# Altium PCB nexusqfp.PcbDoc (part 2 of 2)
Units mm, origin at the board's own origin, x right, y up, seen from the top; angles counter-clockwise.
Board outline 100 x 100 mm, 2 copper layers (Top Layer, Bottom Layer); 128 components, 155 nets, 699 pads, 158 vias.
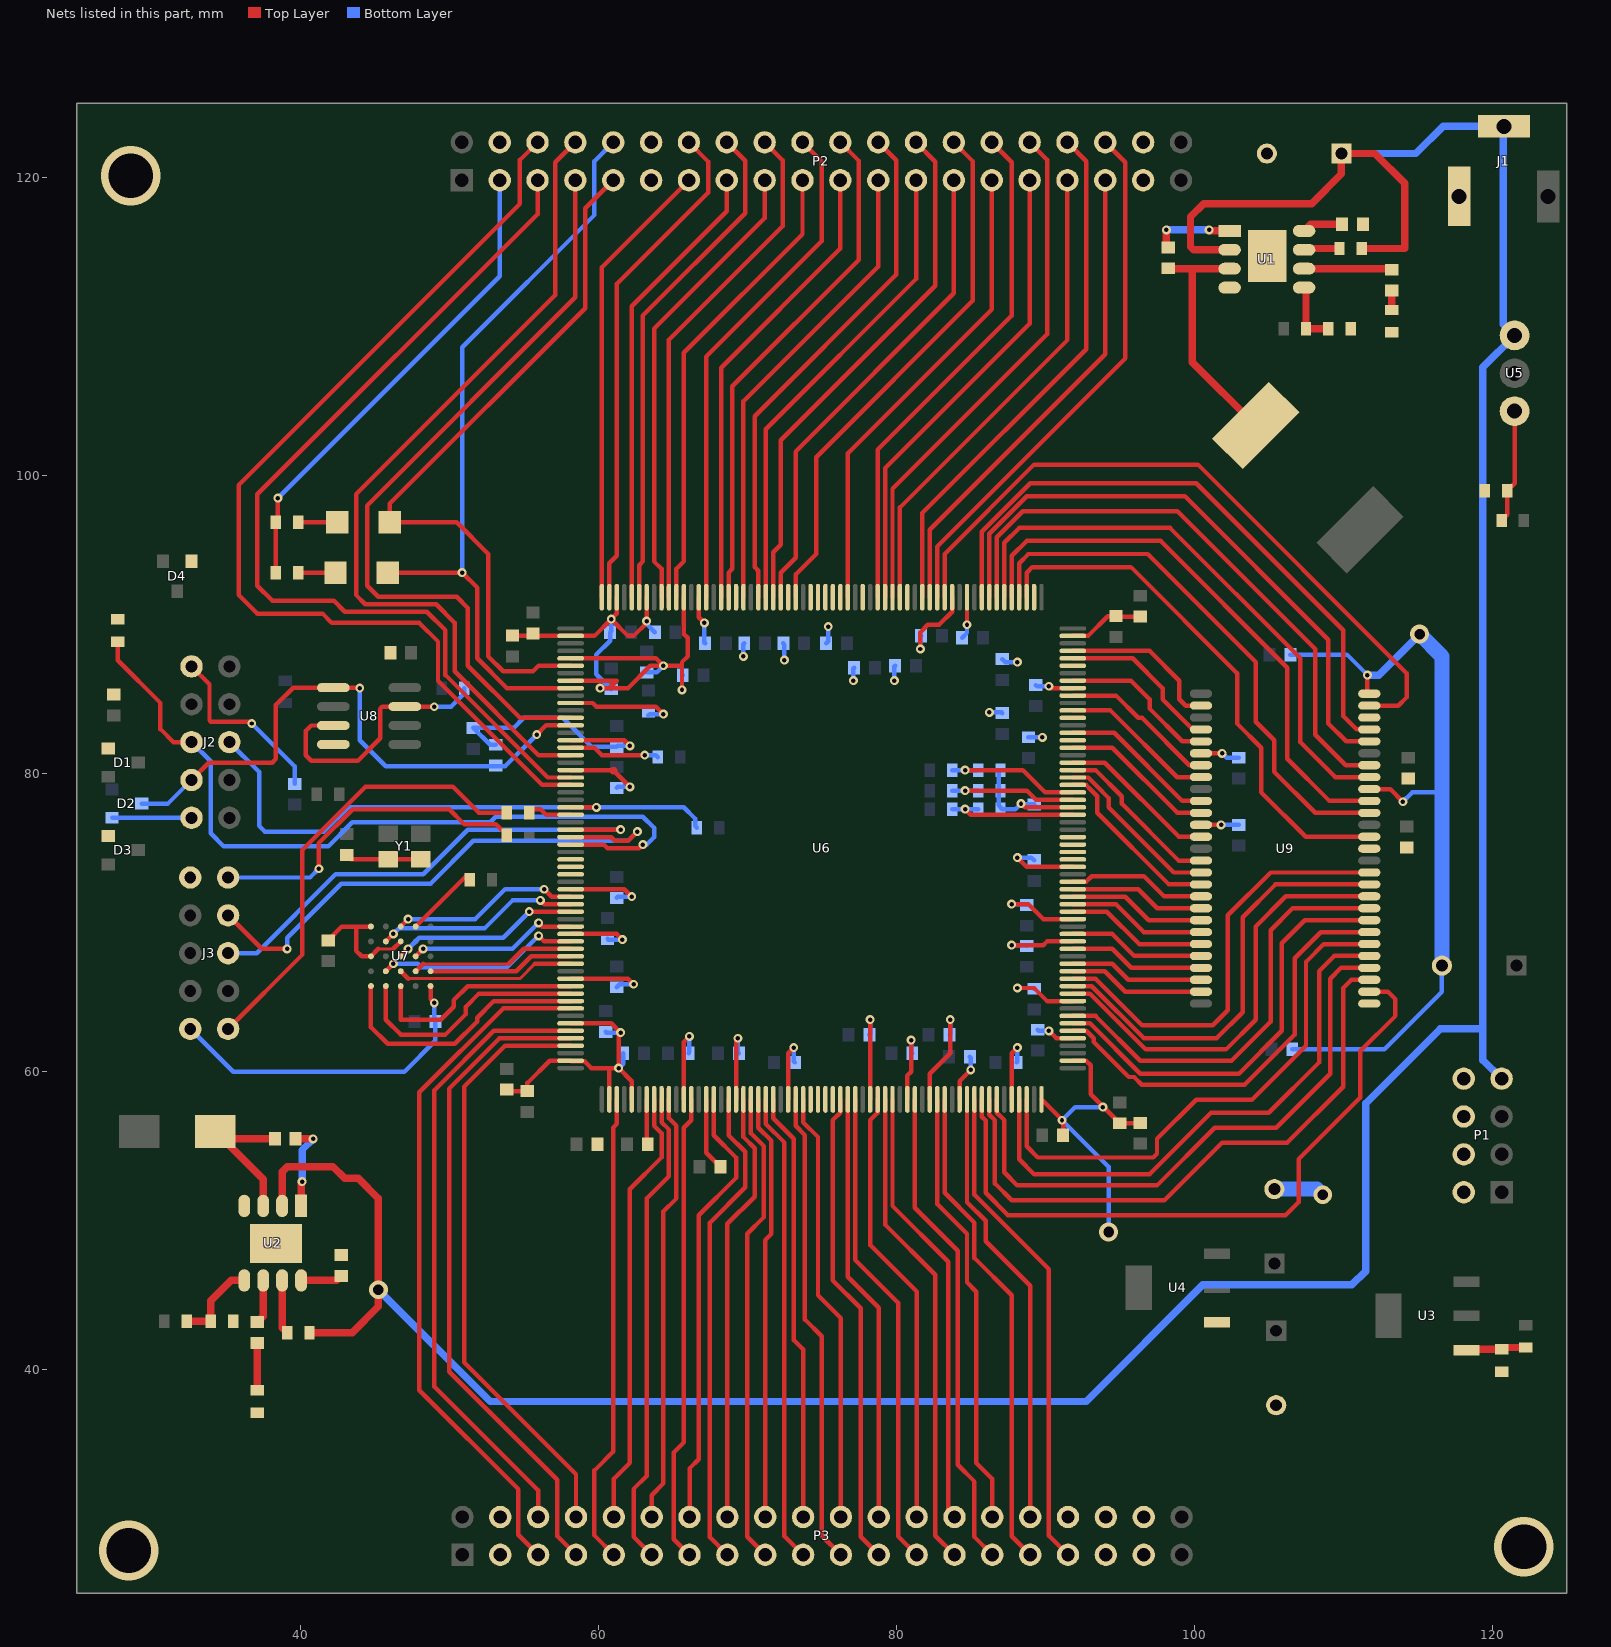
[diagram p2: the nets of this part, all layers, seen from the top]

## Via types
v1: diameter 0.6, hole 0.3, Top Layer to Bottom Layer, tented both sides, 141 vias
v2: diameter 1.27, hole 0.711, Top Layer to Bottom Layer, 14 vias
v3: diameter 4, hole 3, Top Layer to Bottom Layer, 3 vias

## Nets (pads, with @x,y where several pads share a name; then routed paths per layer and width w, separated by ;. In a path a pad name is that pad's centre, name@x,y a point inside that pad or via, vN(x,y) a via of type N, cw(c..) or ccw(c..) an arc to the next point about the centre after c; other vN are vias at no path point) (continued)
FPGA_TDI: R16.2 U6.26 | length 2.9
  Top Layer w0.3: R16.2@55.375,77.625 56.125,77.625 56.5,77.25 U6.26@58.15,77.25
GND: C3.1 C5.1 C7.2 C8.2 C9.2 C10.2 C11.1 C12.1 C13.1 C14.1 C15.2 C16.2 C17.2 C18.2 C19.1 C20.1 C21.1 C22.1 C23.1 C24.1 C25.1 C26.1 C27.1 C28.1 C29.1 C30.1 C31.1 C32.1 C33.1 C34.1 C35.1 C36.1 C37.1 C38.1 C39.1 C40.1 C41.1 C42.1 C43.1 C44.1 C45.1 C46.1 C47.1 C48.1 C49.1 C50.1 C51.1 C52.1 C53.1 C54.1 C55.1 C56.1 C57.1 C58.1 C59.1 C60.1 C61.1 C62.1 C63.1 C64.1 C65.1 C66.1 C67.1 C68.1 C69.1 C70.1 C71.1 C72.1 C73.1 C74.1 C75.1 D1.1 D2.1 D3.1 D4.1 J1.1 J2.2 J2.10 J3.2 J3.10 P1.2 P1.4 P1.6 P1.8 P2.3 P2.4 P2.37 P2.38 P3.3 P3.4 P3.34 P3.35 P3.36 P3.37 P3.38 R6.1 R7.1 R8.1 R9.1 R10.1 R12.1 R21.1 R22.1 R23.1 R24.2 R30.1 R31.1 U1.4 U1.EP U2.4 U2.EP U4.1 U6.2 U6.5 U6.8 U6.11 U6.16 U6.20 U6.32 U6.33 U6.34 U6.36 U6.42 U6.48 U6.54 U6.59 U6.62 U6.65 U6.67 U6.72 U6.75 U6.79 U6.86 U6.89 U6.90 U6.91 U6.92 U6.97 U6.102 U6.105 U6.109 U6.116 U6.120 U6.122 U6.125 U6.130 U6.138 U6.141 U6.148 U6.149 U6.150 U6.151 U6.152 U6.156 U6.165 U6.168 U6.172 U6.175 U6.179 U6.182 U6.191 U6.193 U6.199 U6.205 U6.208 U6.209 U6.210 U6.211 U6.212 U6.215 U6.222 U6.227 U6.229 U6.234 U6.238 U7.A1 U7.B3 U7.C1 U7.E5 U8.4 U9.6 U9.12 U9.28 U9.41 U9.46 U9.52 U9.54 Y1.1 Y1.2 | length 393.9
  Top Layer w0.2: 45.25,68.25 46.25,68.25
  Top Layer w0.3: J2.2@32.71,87.205 33.915,86 33.915,83.585 34,83.5 36.625,83.5 v1(36.75,83.375) ; R31.1@38.375,93.5 R30.1@38.375,96.875 38.5,97 v1(38.5,98.5) ; C12.1@41.875,68.825 42.8,69.75 43.75,69.75 ; C13.1@43.125,74.55 43.4,74.275 Y1.1@45.9,74.275 Y1.2@48.1,74.275 ; U7.A1@44.75,69.75 43.75,69.75 ; 45.25,68.25 U7.C1@44.75,67.75 44.125,67.75 43.75,68.125 43.75,69.75 ; C14.1@46.05,88.05 C14.1@46.05,88.125 ; 46.25,68.25 U7.B3@46.75,68.75 ; U7.E5@48.75,65.75 48.75,64.875 v1(49,64.625) ; C69.1@53.975,58.7 C73.1@55.25,58.7 55.25,59.25 56.75,60.75 U6.59@58.15,60.75 58.198,60.702 59.087,60.702 59.539,60.25 60.625,60.25 ; C68.1@54.25,89.275 55.475,89.275 C72.1@55.625,89.425 55.8,89.25 U6.2@58.15,89.25 59.75,89.25 v1(60.875,90.375) ; U6.54@58.15,63.25 60.875,63.25 v1(61.5,62.625) 61.375,62.5 v1(61.375,60.25) ; U6.48@58.15,66.25 62,66.25 v1(62.375,65.875) ; U6.42@58.15,69.25 61.25,69.25 v1(61.625,68.875) ; U6.36@58.15,72.25 61.75,72.25 v1(62.25,71.75) ; U6.20@58.15,80.25 61,80.25 61.052,80.198 v1(62.125,79.125) ; U6.16@58.15,82.25 61.75,82.25 v1(62.125,81.875) ; U6.11@58.15,84.75 59.634,84.75 59.884,84.5 63.875,84.5 v1(64.375,84) ; U6.8@58.15,86.25 61.25,86.25 60.75,85.75 ; U6.5@58.15,87.75 63.875,87.75 v1(64.375,87.25) ; v1(60.125,85.75) 60.75,85.75 ; U6.62@60.75,58.15 60.75,60.125 60.625,60.25 ; U6.238@61.25,91.85 61.25,90.75 v1(60.875,90.375) ; U6.65@62.25,58.15 62.25,59.375 v1(61.375,60.25) ; U6.67@63.25,58.15 63.25,55.2 C46.1@63.325,55.125 ; U6.234@63.25,91.85 v1(63.25,90.25) 63.25,90.125 62.375,89.25 62,89.25 v1(60.875,90.375) ; v1(65.625,85.625) 65.625,87.125 ; U6.72@65.75,58.15 65.75,62 v1(66.125,62.375) ; U6.229@65.75,91.85 65.75,89.375 66,89.125 66,87.875 65.625,87.5 65.625,87.125 ; U6.227@66.75,91.85 66.75,90.5 v1(67.125,90.125) ; U6.75@67.25,58.15 67.25,54.575 C48.1@68.2,53.625 ; U6.79@69.25,58.15 69.25,62.125 v1(69.375,62.25) ; U6.86@72.75,58.15 72.75,61.25 v1(73.125,61.625) ; U6.97@78.25,58.15 v1(78.25,63.5) ; U6.102@80.75,58.15 80.75,59.75 81,60 v1(81,62.125) ; v1(81.625,88.375) 81.625,89.5 82.125,90 82.875,90 83.75,90.875 U6.193@83.75,91.85 ; U6.105@82.25,58.15 82.25,59.875 83.625,61.25 v1(83.625,63.5) ; U6.109@84.25,58.15 84.25,59.375 v1(85,60.125) ; v1(84.75,90) U6.191@84.75,91.85 ; U6.116@87.75,58.15 87.75,61.25 v1(88.125,61.625) ; v1(87.75,68.5) 89.875,68.5 90.125,68.75 U6.138@91.85,68.75 ; v1(87.75,71.25) 88.875,71.25 89.875,70.25 U6.141@91.85,70.25 ; v1(88.125,65.625) 89.25,65.625 90.125,64.75 U6.130@91.85,64.75 ; v1(88.125,74.375) 88.75,73.75 U6.148@91.85,73.75 ; v1(88.375,78) 88.625,77.75 U6.156@91.85,77.75 ; U6.120@89.75,58.15 91.2,56.7 C52.1@91.2,55.75 ; v1(90.25,62.75) 90.75,62.25 U6.125@91.85,62.25 ; v1(90.25,85.875) 90.375,85.75 U6.172@91.85,85.75 ; U6.122@91.85,60.75 92.739,60.75 93.052,60.437 93.052,58.498 C70.1@95,56.55 96.35,56.55 C74.1@96.375,56.575 ; U6.179@91.85,89.25 92.875,89.25 94.2,90.575 C71.1@94.75,90.575 94.775,90.55 C75.1@96.375,90.55 ; U9.12@100.45,76.575 v1(101.8,76.575) ; U9.6@100.45,81.375 v1(101.875,81.375) ; v1(111.625,86.625) 111.625,85.5 U9.54@111.75,85.375 ; U9.46@111.75,78.975 113.15,78.975 v1(114,78.125) ; 60.625,60.25 v1(61.375,60.25) ; 60.75,85.75 62,85.75 63.5,87.25 v1(64.375,87.25) ; v1(64.375,87.25) 65.5,87.25 65.625,87.125
  Top Layer w0.5: 61,80.198 61.052,80.198
  Bottom Layer w0.3: D2.1@27.375,77.05 32.705,77.05 J2.10@32.71,77.045 ; J3.10@32.625,62.88 35.505,60 47,60 49.075,62.075 C11.1@49.075,63.375 49,63.45 v1(49,64.625) ; v1(36.75,83.375) 39.625,80.5 C17.2@39.625,79.325 ; v1(38.5,98.5) 53.39,113.39 P2.3@53.39,119.835 ; C16.2@53.125,81.95 52.75,81.95 C18.2@51.625,83.075 54.325,83.075 55,83.75 57.625,83.75 59.575,81.8 C26.1@61.25,81.8 61.325,81.875 v1(62.125,81.875) ; v1(60.125,85.75) C25.1@60.8,85.75 ; C44.1@60.5,62.675 60.55,62.625 v1(61.5,62.625) ; C43.1@60.625,68.925 60.675,68.875 v1(61.625,68.875) ; C25.1@60.875,85.675 C25.1@60.8,85.75 ; v1(60.875,90.375) 60.875,89.575 C65.1@60.8,89.5 60.8,88.925 59.875,88 59.875,86.675 C25.1@60.8,85.75 ; C28.1@61.25,65.675 61.45,65.875 v1(62.375,65.875) ; C27.1@61.25,71.675 61.325,71.75 v1(62.25,71.75) ; C42.1@61.25,79.05 61.325,79.125 v1(62.125,79.125) ; v1(61.375,60.25) 61.675,60.55 C29.1@61.675,61.25 ; C41.1@63.25,86.8 63.925,86.8 v1(64.375,87.25) ; v1(63.25,90.25) 63.25,90.05 C66.1@63.8,89.5 ; C67.1@63.375,83.925 63.45,84 v1(64.375,84) ; v1(65.625,85.625) 65.625,86.575 C60.1@65.675,86.625 ; C47.1@66.075,61.25 66.125,61.3 v1(66.125,62.375) ; v1(67.125,90.125) 67.125,88.8 C40.1@67.175,88.75 ; v1(69.375,62.25) 69.375,61.325 C30.1@69.45,61.25 ; v1(69.75,87.875) 69.75,88.7 C64.1@69.8,88.75 ; C39.1@72.425,88.75 72.5,88.675 v1(72.5,87.625) ; v1(73.125,61.625) 73.125,60.7 C49.1@73.2,60.625 ; C38.1@75.3,88.75 75.437,88.887 v1(75.437,89.875) ; v1(77.125,86.25) 77.125,87.075 C63.1@77.175,87.125 ; C31.1@78.2,62.5 78.25,62.55 v1(78.25,63.5) ; v1(79.875,86.25) 79.875,87.2 C62.1@79.925,87.25 ; v1(81,62.125) 81,61.325 C50.1@81.075,61.25 ; v1(81.625,88.375) 81.625,89.2 C37.1@81.675,89.25 ; C32.1@83.575,62.5 83.625,62.55 v1(83.625,63.5) ; C61.1@84.425,89.125 84.75,89.45 v1(84.75,90) ; C51.1@84.95,61 85,60.95 v1(85,60.125) ; v1(86.25,84.125) 87.075,84.125 C58.1@87.125,84.075 ; R23.1@86.875,80.25 86.875,77.875 87.125,77.625 88,77.625 v1(88.375,78) 88.425,77.95 C35.1@89.25,77.95 ; C59.1@87.125,87.7 87.325,87.5 v1(88.125,87.5) ; v1(87.75,68.5) 88.7,68.5 C34.1@88.75,68.45 ; v1(87.75,71.25) 88.7,71.25 C55.1@88.75,71.2 ; C53.1@88.075,60.625 88.125,60.675 v1(88.125,61.625) ; v1(88.125,65.625) 89.2,65.625 C54.1@89.25,65.575 ; v1(88.125,74.375) 89.075,74.375 C56.1@89.25,74.2 ; C57.1@88.875,82.45 88.887,82.438 v1(89.813,82.438) ; C36.1@89.375,85.95 89.45,85.875 v1(90.25,85.875) ; C33.1@89.5,62.825 89.575,62.75 v1(90.25,62.75) ; v1(93.875,57.625) 92,57.625 v1(91.125,56.75) 94.25,53.625 v2(94.25,49.25) ; v1(101.8,76.575) C23.1@103,76.575 ; v1(101.875,81.375) 102.175,81.075 C24.1@103,81.075 ; C22.1@106.45,88 110.25,88 v1(111.625,86.625) ; C21.1@106.575,61.5 112.75,61.5 116.625,65.375 C8.2@116.625,67.125 ; v2@108.25,52.125 v2(108.625,51.75) ; v1(114,78.125) 114.625,78.75 116.625,78.75
  Bottom Layer w0.5: v1(111.625,86.625) 112.375,86.625 v2(115.125,89.375)
  Bottom Layer w1: C9.2@105.375,52.125 v2@108.25,52.125 ; v2(115.125,89.375) 116.625,87.875 116.625,78.75 C8.2@116.625,67.125
  other v3: 28.5,27.875 122.125,28.125 28.625,120.125
GPIO0_0: P2.5 U6.21 | length 63.1
  Top Layer w0.3: P2.5@55.93,119.835 55.93,117.555 37.125,98.75 37.125,92.625 38.125,91.625 42.25,91.625 43,90.875 48.5,90.875 49.75,89.625 49.75,86.625 56.625,79.75 U6.21@58.15,79.75
GPIO0_1: P2.6 U6.22 | length 67.8
  Top Layer w0.3: P2.6@55.93,122.375 54.75,121.195 54.75,118.25 35.875,99.375 35.875,92 37.125,90.75 41.5,90.75 42.125,90.125 48,90.125 49.25,88.875 49.25,86.25 56.25,79.25 U6.22@58.15,79.25
GPIO0_2: P2.7 U6.13 | length 52.6
  Top Layer w0.3: U6.13@58.15,83.75 54.75,83.75 51.25,87.25 51.25,91.125 50.5,91.875 45.25,91.875 44.5,92.625 44.5,98 58.47,111.97 P2.7@58.47,119.835
GPIO0_3: P2.8 U6.18 | length 57.2
  Top Layer w0.3: U6.18@58.15,81.25 56,81.25 50.375,86.875 50.375,90.125 49.125,91.375 44.375,91.375 43.75,92 43.75,98.75 57.125,112.125 57.125,121.03 P2.8@58.47,122.375
GPIO0_4: D5.1 P2.9 U6.6 | length 49.7
  Top Layer w0.3: U6.6@58.15,87.25 56,87.25 55.625,86.875 53.625,86.875 52.625,87.875 52.625,94.75 50.5,96.875 D5.1@46,96.875 46,98.125 59.125,111.25 59.125,117.95 P2.9@61.01,119.835
GPIO0_5: D6.1 P2.10 U6.9 | length 51.3
  Top Layer w0.3: D6.1@45.875,93.501 v1(50.874,93.501) 51.875,92.5 51.875,87.75 53.875,85.75 U6.9@58.15,85.75
  Bottom Layer w0.3: v1(50.874,93.501) 50.874,108.624 59.75,117.5 59.75,121.115 P2.10@61.01,122.375
GPIO0_6: P2.11
GPIO0_7: P2.12
GPIO0_8: P2.13 U6.240 | length 30.4
  Top Layer w0.3: U6.240@60.25,91.85 60.25,113.995 P2.13@66.09,119.835
GPIO0_9: P2.14 U6.239 | length 33.8
  Top Layer w0.3: U6.239@60.75,91.85 60.75,94.125 61.25,94.625 61.25,112.875 67.375,119 67.375,121.09 P2.14@66.09,122.375
GPIO0_10: P2.15 U6.236 | length 30.6
  Top Layer w0.3: U6.236@62.25,91.85 62.25,111.375 68.63,117.755 P2.15@68.63,119.835
GPIO0_11: P2.16 U6.235 | length 34
  Top Layer w0.3: U6.235@62.75,91.85 62.75,94 63,94.25 63,110.75 69.875,117.625 69.875,121.13 P2.16@68.63,122.375
GPIO0_12: P2.17 U6.232 | length 31.3
  Top Layer w0.3: U6.232@64.25,91.85 64.25,93.75 63.75,94.25 63.75,109.875 71.17,117.295 P2.17@71.17,119.835
GPIO0_13: P2.18 U6.231 | length 34.2
  Top Layer w0.3: U6.231@64.75,91.85 64.75,109.125 72.375,116.75 72.375,121.17 P2.18@71.17,122.375
GPIO0_14: P2.19 U6.230 | length 31.5
  Top Layer w0.3: U6.230@65.25,91.85 65.25,93.75 65.75,94.25 65.75,108.25 73.71,116.21 P2.19@73.71,119.835
GPIO0_15: P2.20 U6.226 | length 34.3
  Top Layer w0.3: U6.226@67.25,91.85 67.25,108 75,115.75 75,121.085 P2.20@73.71,122.375
GPIO0_16: P2.21 U6.224 | length 31.3
  Top Layer w0.3: U6.224@68.25,91.85 68.25,107.25 76.25,115.25 P2.21@76.25,119.835
GPIO0_17: P2.22 U6.223 | length 34.7
  Top Layer w0.3: U6.223@68.75,91.85 68.75,93.5 69,93.75 69,106 77.5,114.5 77.5,121.125 P2.22@76.25,122.375
GPIO0_18: P2.23 U6.221 | length 31.7
  Top Layer w0.3: U6.221@69.75,91.85 69.75,105 78.79,114.04 P2.23@78.79,119.835
GPIO0_19: P2.24 U6.219 | length 35.1
  Top Layer w0.3: U6.219@70.75,91.85 70.75,93.625 70.5,93.875 70.5,104 80,113.5 80,121.165 P2.24@78.79,122.375
GPIO0_20: P2.25 U6.218 | length 32.2
  Top Layer w0.3: U6.218@71.25,91.85 71.25,103.125 81.33,113.205 P2.25@81.33,119.835
GPIO0_21: P2.26 U6.217 | length 35.6
  Top Layer w0.3: U6.217@71.75,91.85 71.75,94.875 72.25,95.375 72.25,102.375 82.625,112.75 82.625,121.08 P2.26@81.33,122.375
GPIO0_22: P2.27 U6.216 | length 32.8
  Top Layer w0.3: U6.216@72.25,91.85 72.25,93.5 73.25,94.5 73.25,101.625 83.87,112.245 P2.27@83.87,119.835
GPIO0_23: P2.28 U6.214 | length 36
  Top Layer w0.3: U6.214@73.25,91.85 73.25,93.375 74.625,94.75 74.625,101.25 85.125,111.75 85.125,121.12 P2.28@83.87,122.375
GPIO0_24: P2.29 U6.207 | length 32
  Top Layer w0.3: U6.207@76.75,91.85 76.75,101.5 86.41,111.16 P2.29@86.41,119.835
GPIO0_25: P2.30 U6.203 | length 34.8
  Top Layer w0.3: U6.203@78.75,91.85 78.75,101.75 87.75,110.75 87.75,121.035 P2.30@86.41,122.375
GPIO0_26: P2.31 U6.202 | length 32
  Top Layer w0.3: U6.202@79.25,91.85 79.25,100.5 88.95,110.2 P2.31@88.95,119.835
GPIO0_27: P2.32 U6.201 | length 35.3
  Top Layer w0.3: U6.201@79.75,91.85 79.75,99.125 90.125,109.5 90.125,121.2 P2.32@88.95,122.375
GPIO0_28: P2.33 U6.200 | length 32.6
  Top Layer w0.3: U6.200@80.25,91.85 80.25,97.875 91.49,109.115 P2.33@91.49,119.835
GPIO0_29: P2.34 U6.197 | length 35.6
  Top Layer w0.3: U6.197@81.75,91.85 81.75,97.5 92.75,108.5 92.75,121.115 P2.34@91.49,122.375
GPIO0_30: P2.35 U6.196 | length 32.9
  Top Layer w0.3: U6.196@82.25,91.85 82.25,96.375 94.03,108.155 P2.35@94.03,119.835
GPIO0_31: P2.36 U6.195 | length 36.3
  Top Layer w0.3: U6.195@82.75,91.85 82.75,95.25 95.375,107.875 95.375,121.03 P2.36@94.03,122.375
GPIO1_0: P3.5 U6.52 | length 46.8
  Top Layer w0.3: P3.5@55.97,27.585 54.625,28.93 54.625,32 48,38.625 48,58.625 53.625,64.25 U6.52@58.15,64.25
GPIO1_1: P3.6 U6.55 | length 42.3
  Top Layer w0.3: P3.6@55.97,30.125 55.97,31.905 49,38.875 49,58.75 53,62.75 U6.55@58.15,62.75
GPIO1_2: P3.7 U6.56 | length 44.4
  Top Layer w0.3: U6.56@58.15,62.25 53.375,62.25 50,58.875 50,39.875 57.25,32.625 57.25,28.845 P3.7@58.51,27.585
GPIO1_3: P3.8 U6.57 | length 40.3
  Top Layer w0.3: U6.57@58.15,61.75 53.75,61.75 51,59 51,40.5 58.51,32.99 P3.8@58.51,30.125
GPIO1_4: P3.9 U6.63 | length 31.7
  Top Layer w0.3: P3.9@61.05,27.585 59.75,28.885 59.75,33.25 61,34.5 61,56.25 61.25,56.5 U6.63@61.25,58.15
GPIO1_5: P3.10 U6.68 | length 29.6
  Top Layer w0.3: P3.10@61.05,30.125 61.05,32.675 62.125,33.75 62.125,52.125 64.25,54.25 64.25,55.875 63.75,56.375 U6.68@63.75,58.15
GPIO1_6: P3.11 U6.69 | length 32.3
  Top Layer w0.3: P3.11@63.59,27.585 62.375,28.8 62.375,32 63.25,32.875 63.25,51.5 64.75,53 64.75,56.125 64.25,56.625 U6.69@64.25,58.15
GPIO1_7: P3.12 U6.70 | length 28.9
  Top Layer w0.3: P3.12@63.59,30.125 63.59,31.59 64.375,32.375 64.375,50.625 65.25,51.5 65.25,56.375 64.75,56.875 U6.70@64.75,58.15
GPIO1_8: P3.13 U6.73 | length 31.5
  Top Layer w0.3: P3.13@66.13,27.585 65.078,28.637 65.078,34.453 65.75,35.125 65.75,56.25 66.25,56.75 U6.73@66.25,58.15
GPIO1_9: P3.14 U6.76 | length 29.9
  Top Layer w0.3: P3.14@66.13,30.125 66.13,33.38 66.75,34 66.75,50.375 69.25,52.875 69.25,54.25 67.75,55.75 U6.76@67.75,58.15
GPIO1_10: P3.15 U6.78 | length 32.5
  Top Layer w0.3: P3.15@68.67,27.585 67.5,28.755 67.5,49.875 69.875,52.25 69.875,54.625 68.75,55.75 U6.78@68.75,58.15
GPIO1_11: P3.16 U6.80 | length 29.1
  Top Layer w0.3: P3.16@68.67,30.125 68.67,49.795 70.5,51.625 70.5,54.875 69.75,55.625 U6.80@69.75,58.15
GPIO1_12: P3.17 U6.81 | length 31.9
  Top Layer w0.3: U6.81@70.25,58.15 70.25,55.875 71.125,55 71.125,50.25 70,49.125 70,28.795 P3.17@71.21,27.585
GPIO1_13: P3.18 U6.82 | length 28.6
  Top Layer w0.3: U6.82@70.75,58.15 70.75,56.25 71.625,55.375 71.625,49.125 71.21,48.71 P3.18@71.21,30.125
GPIO1_14: P3.19 U6.83 | length 31.6
  Top Layer w0.3: U6.83@71.25,58.15 71.25,56.5 72.5,55.25 72.5,28.835 P3.19@73.75,27.585
GPIO1_15: P3.20 U6.84 | length 28.9
  Top Layer w0.3: U6.84@71.75,58.15 71.75,56.875 73.125,55.5 73.125,42 73.75,41.375 P3.20@73.75,30.125
GPIO1_16: P3.21 U6.87 | length 31.8
  Top Layer w0.3: U6.87@73.25,58.15 73.25,56.375 73.875,55.75 73.875,43.375 75,42.25 75,28.875 P3.21@76.29,27.585
GPIO1_17: P3.22 U6.88 | length 29.1
  Top Layer w0.3: U6.88@73.75,58.15 73.75,56.625 74.75,55.625 74.75,45 76.29,43.46 P3.22@76.29,30.125
GPIO1_18: P3.23 U6.93 | length 32
  Top Layer w0.3: U6.93@76.25,58.15 76.25,57.261 75.75,56.761 75.75,46 77.625,44.125 77.625,28.79 P3.23@78.83,27.585
GPIO1_19: P3.24 U6.94 | length 28.9
  Top Layer w0.3: U6.94@76.75,58.15 76.75,46.25 78.83,44.17 P3.24@78.83,30.125
GPIO1_20: P3.25 U6.95 | length 32.3
  Top Layer w0.3: U6.95@77.25,58.15 77.25,47.375 80.125,44.5 80.125,28.83 P3.25@81.37,27.585
GPIO1_21: P3.26 U6.98 | length 29.5
  Top Layer w0.3: U6.98@78.75,58.15 78.75,57.261 78.25,56.761 78.25,48.375 81.37,45.255 P3.26@81.37,30.125
GPIO1_22: P3.27 U6.99 | length 32.5
  Top Layer w0.3: U6.99@79.25,58.15 79.25,49.75 82.625,46.375 82.625,28.87 P3.27@83.91,27.585
GPIO1_23: P3.28 U6.100 | length 29.7
  Top Layer w0.3: U6.100@79.75,58.15 79.75,51 83.5,47.25 83.5,30.535 P3.28@83.91,30.125
GPIO1_24: P3.29 U6.103 | length 32.7
  Top Layer w0.3: U6.103@81.25,58.15 81.25,50.875 84.125,48 84.125,33.625 85.25,32.5 85.25,28.785 P3.29@86.45,27.585
GPIO1_25: P3.30 U6.106 | length 29.6
  Top Layer w0.3: U6.106@82.75,58.15 82.75,51.125 84.75,49.125 84.75,45.875 85.375,45.25 85.375,33.75 86.45,32.675 P3.30@86.45,30.125
GPIO1_26: P3.31 U6.107 | length 32.9
  Top Layer w0.3: U6.107@83.25,58.15 83.25,51.875 85.25,49.875 85.25,47.5 87.75,45 87.75,28.825 P3.31@88.99,27.585
GPIO1_27: P3.32 U6.110 | length 29.8
  Top Layer w0.3: U6.110@84.75,58.15 84.75,51.25 86,50 86,48.625 88.99,45.635 P3.32@88.99,30.125
GPIO1_28: P3.33 U6.111 | length 33.2
  Top Layer w0.3: U6.111@85.25,58.15 85.25,51.75 90.25,46.75 90.25,28.865 P3.33@91.53,27.585
HyperBUS_CK: U6.38 U7.B2 | length 13.6
  Top Layer w0.3: U7.B2@45.75,68.75 v1(46.25,69.25) ; v1(56.125,71.5) 56.375,71.25 U6.38@58.15,71.25
  Bottom Layer w0.3: v1(46.25,69.25) 46.648,69.648 52.398,69.648 54.25,71.5 v1(56.125,71.5)
HyperBUS_DQ0: U6.46 U7.D3 | length 12
  Top Layer w0.2: 47.25,66.25 54.75,66.25 55.75,67.25
  Top Layer w0.3: U7.D3@46.75,66.75 47.25,66.25 ; 55.75,67.25 U6.46@58.15,67.25
HyperBUS_DQ1: U6.43 U7.D2 | length 13.7
  Top Layer w0.3: U7.D2@45.75,66.75 v1(46.25,67.25) ; v1(56,69.125) 56.375,68.75 U6.43@58.15,68.75
  Bottom Layer w0.3: v1(46.25,67.25) 47.897,67.25 48.147,67 53.875,67 v1(56,69.125)
HyperBUS_DQ2: U6.41 U7.C4 | length 11.4
  Top Layer w0.3: U7.C4@47.75,67.75 v1(48.25,68.25) ; v1(56,70) 56.25,69.75 U6.41@58.15,69.75
  Bottom Layer w0.3: v1(48.25,68.25) 54.25,68.25 v1(56,70)
HyperBUS_DQ3: U6.44 U7.D4 | length 11
  Top Layer w0.2: 48.25,67.25 54,67.25
  Top Layer w0.3: U7.D4@47.75,66.75 48.25,67.25 ; 54,67.25 55,68.25 U6.44@58.15,68.25
HyperBUS_DQ4: U6.45 U7.D5 | length 9.8
  Top Layer w0.3: U7.D5@48.75,66.75 54.5,66.75 55.5,67.75 U6.45@58.15,67.75
HyperBUS_DQ5: U6.49 U7.E3 | length 14.8
  Top Layer w0.3: U7.E3@46.75,65.75 46.75,63.5 49.438,63.5 50.313,64.375 50.313,64.813 51.25,65.75 U6.49@58.15,65.75
HyperBUS_DQ6: U6.50 U7.E2 | length 16.5
  Top Layer w0.3: U7.E2@45.75,65.75 45.75,63.5 46.75,62.5 49.75,62.5 51.125,63.875 51.125,64.375 52,65.25 U6.50@58.15,65.25
HyperBUS_DQ7: U6.51 U7.E1 | length 18
  Top Layer w0.3: U7.E1@44.75,65.75 44.75,63 45.875,61.875 50.375,61.875 51.875,63.375 51.875,63.625 53,64.75 U6.51@58.15,64.75
HyperBUS_nCS: U6.37 U7.A3 | length 12.6
  Top Layer w0.3: U7.A3@46.75,69.75 v1(47.25,70.25) ; v1(56.375,72.25) 56.875,71.75 U6.37@58.15,71.75
  Bottom Layer w0.3: v1(47.25,70.25) 51.75,70.25 53.75,72.25 v1(56.375,72.25)
HyperBUS_nRESET: R13.1 U7.A4 | length 5
  Top Layer w0.3: U7.A4@47.75,69.75 51.125,73.125 R13.1@51.375,73.125
HyperBUS_RWDS: U6.39 U7.C3 | length 12.6
  Top Layer w0.3: U7.C3@46.75,67.75 v1(47.25,68.25) ; v1(55.375,70.75) U6.39@58.15,70.75
  Bottom Layer w0.3: v1(47.25,68.25) 48,69 53.625,69 v1(55.375,70.75)
JTAG_TCK: J3.1 R17.1 | length 22.3
  Top Layer w0.3: v1(41.25,73.625) 41.25,75.352 43.523,77.625 50,77.625 51,76.625 53.125,76.625 R17.1@53.875,75.875
  Bottom Layer w0.3: J3.1@35.165,73.04 40.665,73.04 v1(41.25,73.625)
JTAG_TDI: J3.9 R16.1 | length 30.3
  Top Layer w0.3: J3.9@35.165,62.88 40.125,67.84 40.125,74.866 44.384,79.125 50.25,79.125 52,77.375 R16.1@53.875,77.375
JTAG_TDO: J3.3 U6.29 | length 36.9
  Top Layer w0.3: J3.3@35.165,70.5 37.415,68.25 v1(39.125,68.25) ; U6.29@58.15,75.75 60.875,75.75 61.125,75.5 62,75.5 v1(62.625,76.125)
  Bottom Layer w0.3: v1(39.125,68.25) 39.125,69 42.75,72.625 48.75,72.625 51.625,75.5 62,75.5 v1(62.625,76.125)
JTAG_TMS: J3.5 U6.28 | length 33.1
  Top Layer w0.3: U6.28@58.15,76.25 v1(61.5,76.25)
  Bottom Layer w0.3: J3.5@35.165,67.96 37.085,67.96 42.375,73.25 48.25,73.25 51.25,76.25 v1(61.5,76.25)
MSEL0: R18.1 R21.2 U6.155 | length 9.1
  Top Layer w0.3: v1(84.625,77.625) 85,77.25 U6.155@91.85,77.25
  Bottom Layer w0.3: R18.1@83.75,77.625 R21.2@85.5,77.625
MSEL1: R19.1 R22.2 U6.157 | length 9.2
  Top Layer w0.3: v1(84.625,78.875) 88.75,78.875 89.375,78.25 U6.157@91.85,78.25
  Bottom Layer w0.3: R19.1@83.75,78.875 R22.2@85.5,78.875
MSEL2: R20.1 R23.2 U6.158 | length 9.5
  Top Layer w0.3: v1(84.625,80.25) 88.5,80.25 90,78.75 U6.158@91.85,78.75
  Bottom Layer w0.3: R20.1@83.75,80.25 v1(84.625,80.25) R23.2@85.375,80.25
nCE: J2.6 R24.1 U6.30 | length 54.1
  Top Layer w0.3: R24.1@27.75,88.875 27.75,87.625 30.625,84.75 30.625,83 31.5,82.125 J2.6@32.71,82.125 ; U6.30@58.15,75.25 60.375,75.25 60.625,75 62.75,75 v1(63,75.25)
  Bottom Layer w0.3: J2.6@32.71,82.125 34,80.835 34,76 34.875,75.125 41.875,75.125 43.5,76.75 52.75,76.75 53.125,77.125 63,77.125 63.75,76.375 63.75,75.75 63.25,75.25 v1(63,75.25)
nCONFIG: J2.5 R25.2 U6.25 | length 39.2
  Top Layer w0.3: U6.25@58.15,77.75 v1(59.875,77.75)
  Bottom Layer w0.3: J2.5@35.25,82.125 37.25,80.125 37.25,76.5 37.625,76.125 41.594,76.125 43.219,77.75 v1(59.875,77.75) 65.75,77.75 66.5,77 66.5,76.5 R25.2@66.625,76.375
nCSO: C16.1 D2.3 J2.8 U6.14 U8.1 | length 39.5
  Top Layer w0.3: J2.8@32.71,79.585 33.875,80.75 38.125,80.75 38.375,81 38.375,84.625 39.53,85.78 U8.1@42.225,85.78 43.97,85.78 v1(44,85.75) ; v1(55.875,82.625) 56.5,83.25 U6.14@58.15,83.25
  Bottom Layer w0.3: D2.3@29.375,78 31.125,78 J2.8@32.71,79.585 ; v1(44,85.75) 44,82.25 45.75,80.5 53.75,80.5 v1(55.875,82.625)
NetC1_1: C1.1 L1.1 U1.3 | length 16.1
  Top Layer w0.5: C1.1@98.53,113.895 99.875,113.895 ; U1.3@102.375,113.895 99.875,113.895 ; L1.1@104.125,103.375 99.875,107.625 99.875,113.895
NetC1_2: C1.2 U1.1 | length 5.5
  Top Layer w0.5: v1(98.125,116.5) 98.125,115.45 C1.2@98.25,115.325 ; v1(101,116.5) 101.065,116.435 U1.1@102.375,116.435
  Bottom Layer w0.5: v1(98.125,116.5) v1(101,116.5)
NetC2_1: C2.1 L2.1 U2.3 | length 9.8
  Top Layer w0.5: L2.1@34.3,56 L2.1@34.8,55.5 ; U2.3@37.52,51 37.52,52.78 L2.1@34.8,55.5 ; C2.1@38.3,55.5 L2.1@34.8,55.5
NetC2_2: C2.2 U2.1 | length 6
  Top Layer w0.5: C2.2@39.7,55.5 v1(40.875,55.5) ; U2.1@40.06,51 40.06,52.56 v1(40.125,52.625)
  Bottom Layer w0.5: v1(40.125,52.625) 40.125,54.75 v1(40.875,55.5)
NetC3_2: C3.2 U1.8 | length 2.7
  Top Layer w0.5: U1.8@107.375,116.435 107.815,116.875 C3.2@109.925,116.875
NetC4_1: C4.1 R9.2 | length 1.3
  Top Layer w0.5: R9.2@113.25,111.125 C4.1@113.25,112.425
NetC4_2: C4.2 U1.6 | length 5.9
  Top Layer w0.5: U1.6@107.375,113.895 113.18,113.895 C4.2@113.25,113.825
NetC5_2: C5.2 U2.8 | length 2.8
  Top Layer w0.5: U2.8@40.06,46 42.45,46 C5.2@42.75,46.3
NetC6_1: C6.1 R10.2 | length 3.2
  Top Layer w0.5: R10.2@37.125,38.625 C6.1@37.125,41.8
NetC6_2: C6.2 U2.6 | length 3
  Top Layer w0.5: C6.2@37.125,43.2 37.52,43.595 U2.6@37.52,46
NetD5_2: D5.2 R30.2 | length 2.6
  Top Layer w0.3: R30.2@39.875,96.875 D5.2@42.5,96.875
NetD6_2: D6.2 R31.2 | length 2.5
  Top Layer w0.3: R31.2@39.875,93.5 R31.2@39.875,93.5 D6.2@42.375,93.501
NetR1_1: R1.1 R6.2 U3.1 | length 4
  Top Layer w0.5: U3.1@118.275,41.325 118.325,41.375 R6.2@120.625,41.375 120.75,41.5 R1.1@122.25,41.5
NetR2_1: R2.1 U1.7 | length 2.4
  Top Layer w0.5: U1.7@107.375,115.165 107.46,115.25 R2.1@109.75,115.25
NetR3_1: R3.1 U2.7 | length 3.6
  Top Layer w0.5: U2.7@38.79,46 38.79,42.835 R3.1@39.125,42.5
NetR4_2: R4.2 R7.2 U1.5 | length 4.3
  Top Layer w0.5: U1.5@107.375,112.625 107.5,112.5 R4.2@107.5,109.875 R7.2@109,109.875
NetR5_2: R5.2 R8.2 U2.5 | length 5.8
  Top Layer w0.5: R5.2@32.375,43.25 R8.2@34,43.25 34,44.625 35.375,46 U2.5@36.25,46
NetR11_1: R11.1 R12.2 U5.1 | length 7.7
  Top Layer w0.3: R11.1@120.625,97 121,97.375 R12.2@121,99 121.5,99.5 U5.1@121.5,104.335
NetR14_1: R14.1 U8.3 U8.7 | length 17.8
  Top Layer w0.3: U8.3@42.225,83.24 40.74,83.24 40.375,82.875 40.375,81.25 40.75,80.875 43.875,80.875 45.375,82.375 45.375,84.375 45.51,84.51 U8.7@47.025,84.51 47.035,84.5 v1(49,84.5)
  Bottom Layer w0.3: v1(49,84.5) 50.125,84.5 51,85.375 R14.1@51,85.75
nSTATUS: R26.2 U6.17 | length 6.1
  Top Layer w0.3: U6.17@58.15,81.75 59.75,81.75 60.25,81.25 v1(63.125,81.25)
  Bottom Layer w0.3: v1(63.125,81.25) 63.875,81.25 R26.2@64,81.125
SDRAM_A0: U6.139 U9.23 | length 9.2
  Top Layer w0.3: U6.139@91.85,69.25 94.5,69.25 95.975,67.775 U9.23@100.45,67.775
SDRAM_A1: U6.137 U9.24 | length 9.1
  Top Layer w0.3: U6.137@91.85,68.25 94.5,68.25 95.775,66.975 U9.24@100.45,66.975
SDRAM_A2: U6.135 U9.25 | length 9
  Top Layer w0.3: U6.135@91.85,67.25 94.5,67.25 95.575,66.175 U9.25@100.45,66.175
SDRAM_A3: U6.134 U9.26 | length 9.2
  Top Layer w0.3: U6.134@91.85,66.75 94,66.75 95.375,65.375 U9.26@100.45,65.375
SDRAM_A4: U6.112 U9.29 | length 46.6
  Top Layer w0.3: U6.112@85.75,58.15 85.75,56.982 86,56.732 86,51.875 87.5,50.375 106.125,50.375 107,51.25 107,54.125 111.125,58.25 111.125,61.375 113.5,63.75 113.5,64.875 113,65.375 U9.29@111.75,65.375
SDRAM_A5: U6.113 U9.30 | length 41.4
  Top Layer w0.3: U6.113@86.25,58.15 86.25,57.122 86.625,56.747 86.625,52.5 87.75,51.375 98,51.375 101.875,55.25 106.25,55.25 110,59 110,65.625 110.55,66.175 U9.30@111.75,66.175
SDRAM_A6: U6.114 U9.31 | length 39.8
  Top Layer w0.3: U6.114@86.75,58.15 86.75,57.261 87.25,56.761 87.25,53.25 88.125,52.375 97.5,52.375 101.375,56.25 105.5,56.25 109.125,59.875 109.125,66.25 109.85,66.975 U9.31@111.75,66.975
SDRAM_A7: U6.117 U9.32 | length 37.6
  Top Layer w0.3: U6.117@88.25,58.15 88.25,54.125 89.25,53.125 97,53.125 101.125,57.25 105,57.25 108.375,60.625 108.375,66.75 109.4,67.775 U9.32@111.75,67.775
SDRAM_A8: U6.118 U9.33 | length 36.3
  Top Layer w0.3: U6.118@88.75,58.15 88.75,55 89.5,54.25 97.25,54.25 97.5,54.5 97.5,55.5 100.125,58.125 103.875,58.125 107.5,61.75 107.5,67.375 108.7,68.575 U9.33@111.75,68.575
SDRAM_A9: U6.126 U9.34 | length 28.8
  Top Layer w0.3: U6.126@91.85,62.75 92.75,62.75 93.25,62.25 93.25,62 95.598,59.652 95.959,59.652 96.486,59.125 103.375,59.125 106.75,62.5 106.75,67.625 108.5,69.375 U9.34@111.75,69.375
SDRAM_A10: U6.142 U9.22 | length 9.5
  Top Layer w0.3: U6.142@91.85,70.75 94.125,70.75 96.3,68.575 U9.22@100.45,68.575
SDRAM_A11: U6.127 U9.35 | length 29
  Top Layer w0.3: U6.127@91.85,63.25 93,63.25 96.375,59.875 103,59.875 105.875,62.75 105.875,68.625 107.425,70.175 U9.35@111.75,70.175
SDRAM_A12: U6.128 U9.36 | length 29
  Top Layer w0.3: U6.128@91.85,63.75 93.375,63.75 96.375,60.75 102.5,60.75 105.125,63.375 105.125,69.5 106.6,70.975 U9.36@111.75,70.975
SDRAM_BA0: U6.144 U9.20 | length 9.3
  Top Layer w0.3: U6.144@91.85,71.75 95.375,71.75 96.95,70.175 U9.20@100.45,70.175
SDRAM_BA1: U6.143 U9.21 | length 9.4
  Top Layer w0.3: U6.143@91.85,71.25 94.75,71.25 96.625,69.375 U9.21@100.45,69.375
SDRAM_CKE: U6.131 U9.37 | length 29.4
  Top Layer w0.3: U6.131@91.85,65.25 92.986,65.25 96.736,61.5 102.125,61.5 104.125,63.5 104.125,69.75 106.15,71.775 U9.37@111.75,71.775
SDRAM_CLK: U6.132 U9.38 | length 29.4
  Top Layer w0.3: U6.132@91.85,65.75 93.125,65.75 96.625,62.25 101.5,62.25 103.25,64 103.25,70.375 105.45,72.575 U9.38@111.75,72.575
SDRAM_DQ0: U6.177 U9.2 | length 10.9
  Top Layer w0.3: U6.177@91.85,88.25 97,88.25 99,86.25 99,85 99.425,84.575 U9.2@100.45,84.575
SDRAM_DQ1: U6.176 U9.4 | length 11
  Top Layer w0.3: U6.176@91.85,87.75 95.875,87.75 97.875,85.75 97.875,85 99.9,82.975 U9.4@100.45,82.975
SDRAM_DQ2: U6.173 U9.5 | length 10.7
  Top Layer w0.3: U6.173@91.85,86.25 95.75,86.25 97,85 97,84.375 99.2,82.175 U9.5@100.45,82.175
SDRAM_DQ3: U6.171 U9.7 | length 10.5
  Top Layer w0.3: U6.171@91.85,85.25 94.75,85.25 96.25,83.75 96.5,83.75 99.675,80.575 U9.7@100.45,80.575
SDRAM_DQ4: U6.169 U9.8 | length 10.5
  Top Layer w0.3: U6.169@91.85,84.25 94.375,84.25 98.85,79.775 U9.8@100.45,79.775
SDRAM_DQ5: U6.166 U9.10 | length 10.5
  Top Layer w0.3: U6.166@91.85,82.75 94.625,82.75 99.2,78.175 U9.10@100.45,78.175
SDRAM_DQ6: U6.164 U9.11 | length 10.4
  Top Layer w0.3: U6.164@91.85,81.75 94.5,81.75 98.875,77.375 U9.11@100.45,77.375
SDRAM_DQ7: U6.162 U9.13 | length 10.7
  Top Layer w0.3: U6.162@91.85,80.75 94,80.75 98.975,75.775 U9.13@100.45,75.775
SDRAM_DQ8: U6.183 U9.42 | length 36
  Top Layer w0.3: U6.183@88.75,91.85 88.75,93.5 89.125,93.875 95.75,93.875 102.875,86.75 102.875,83.375 104.5,81.75 104.5,78.75 107.475,75.775 U9.42@111.75,75.775
SDRAM_DQ9: U6.184 U9.44 | length 36.8
  Top Layer w0.3: U6.184@88.25,91.85 88.25,94.125 88.875,94.75 96.875,94.75 104.125,87.5 104.125,83.5 105.375,82.25 105.375,80.125 108.125,77.375 U9.44@111.75,77.375
SDRAM_DQ10: U6.185 U9.45 | length 38
  Top Layer w0.3: U6.185@87.75,91.85 87.75,94.625 88.75,95.625 97.75,95.625 106.25,87.125 106.25,81 109.075,78.175 U9.45@111.75,78.175
SDRAM_DQ11: U6.186 U9.47 | length 38.8
  Top Layer w0.3: U6.186@87.25,91.85 87.25,95.5 88.25,96.5 98.375,96.5 107.125,87.75 107.125,82.125 109.475,79.775 U9.47@111.75,79.775
SDRAM_DQ12: U6.187 U9.48 | length 40.2
  Top Layer w0.3: U6.187@86.75,91.85 86.75,95.875 88.5,97.625 98.875,97.625 108.125,88.375 108.125,82.625 110.175,80.575 U9.48@111.75,80.575
SDRAM_DQ13: U6.188 U9.50 | length 40.9
  Top Layer w0.3: U6.188@86.25,91.85 86.25,96.111 88.764,98.625 99.375,98.625 109,89 109,83.375 110.2,82.175 U9.50@111.75,82.175
SDRAM_DQ14: U6.189 U9.51 | length 42
  Top Layer w0.3: U6.189@85.75,91.85 85.75,96.25 89,99.5 100.125,99.5 110,89.625 110,83.875 110.9,82.975 U9.51@111.75,82.975
SDRAM_DQ15: U6.194 U9.53 | length 46.5
  Top Layer w0.3: U6.194@83.25,91.85 83.25,94.75 89.25,100.75 100.25,100.75 114.25,86.75 114.25,85.125 113.7,84.575 U9.53@111.75,84.575
SDRAM_DQM0: U6.161 U9.15 | length 11.4
  Top Layer w0.3: U6.161@91.85,80.25 93.375,80.25 95.125,78.5 95.125,78 98.95,74.175 U9.15@100.45,74.175
SDRAM_DQM1: U6.133 U9.39 | length 29.2
  Top Layer w0.3: U6.133@91.85,66.25 93.375,66.25 96.5,63.125 101.25,63.125 102.25,64.125 102.25,70.5 105.125,73.375 U9.39@111.75,73.375
SDRAM_nCAS: U6.159 U9.17 | length 12
  Top Layer w0.3: U6.159@91.85,79.25 92.739,79.25 93.052,78.937 93.052,78.934 93.5,78.486 93.5,77.375 98.3,72.575 U9.17@100.45,72.575
SDRAM_nCS: U6.145 U9.19 | length 9.1
  Top Layer w0.3: U6.145@91.85,72.25 96.25,72.25 97.525,70.975 U9.19@100.45,70.975
SDRAM_nRAS: U6.146 U9.18 | length 9.3
  Top Layer w0.3: U6.146@91.85,72.75 92.739,72.75 93.114,73.125 96.625,73.125 97.975,71.775 U9.18@100.45,71.775
SDRAM_nWE: U6.160 U9.16 | length 11.6
  Top Layer w0.3: U6.160@91.85,79.75 92.878,79.75 93.504,79.124 93.504,79.121 94.25,78.375 94.25,77.75 98.625,73.375 U9.16@100.45,73.375
VIN: C7.1 J1.3 P1.7 R2.2 R3.2 U1.2 U2.2 U5.3 | length 223.5
  Top Layer w0.5: U2.2@38.79,51 38.79,53.29 39.125,53.625 42.203,53.625 42.98,52.848 43.902,52.848 45.25,51.5 v2(45.25,45.375) 45.25,44.25 43.5,42.5 R3.2@40.625,42.5 ; U1.2@102.375,115.165 99.96,115.165 99.75,115.375 99.75,117.375 100.625,118.25 107.875,118.25 109.875,120.25 C7.1@109.875,121.625 112.125,121.625 114.125,119.625 114.125,115.25 R2.2@111.25,115.25
  Bottom Layer w0.5: v2(45.25,45.375) 52.75,37.875 92.75,37.875 100.577,45.702 110.577,45.702 111.5,46.625 111.5,57.875 116.5,62.875 119.375,62.875 ; C7.1@109.875,121.625 114.875,121.625 116.7,123.45 120.75,123.45 120.75,110.165 U5.3@121.5,109.415 119.375,107.29 119.375,62.875 ; P1.7@120.625,59.54 119.375,60.79 119.375,62.875
pads on no net: J1.2 J3.6 J3.7 J3.8 U7.A2 U7.A5 U7.B1 U7.B5 U7.C2 U7.C5 U9.40
copper on no net:
  other v1: 57.375,127.625
  other v2: 55.25,127.625

## Polygon pours and split planes (outlines as drawn)
GND on Top Layer "GND" (solid, pour order 0): 25,25 25,125 125,125 125,25

## Silkscreen, mask and mechanical layers (free items; w line width, h text height)
Top Overlay:
  text "ArmleoPC Rev 0.1 / Arman Avetisyan / (C) 2018" at 27,100.75 h1.52
Mechanical 1:
  the board outline again, w0

## Text inside footprints (layer, text, board x,y; h text height)
P1: Top Overlay "2" at 118.593,49.38 h1.27 r90; Top Overlay "1" at 121.133,49.888 h1.27 r90; Top Overlay "7" at 121.133,61.064 h1.27 r90; Top Overlay "8" at 118.593,61.064 h1.27 r90
P2: Top Overlay "39" at 101.142,119.202 h1.27; Top Overlay "40" at 101.142,121.742 h1.27; Top Overlay "2" at 48.185,121.742 h1.27; Top Overlay "1" at 48.185,119.202 h1.27
P3: Top Overlay "39" at 101.182,27.077 h1.27; Top Overlay "40" at 101.182,29.617 h1.27; Top Overlay "2" at 48.35,29.617 h1.27; Top Overlay "1" at 48.35,27.077 h1.27